# Allegro board OSCILLATOR.brd
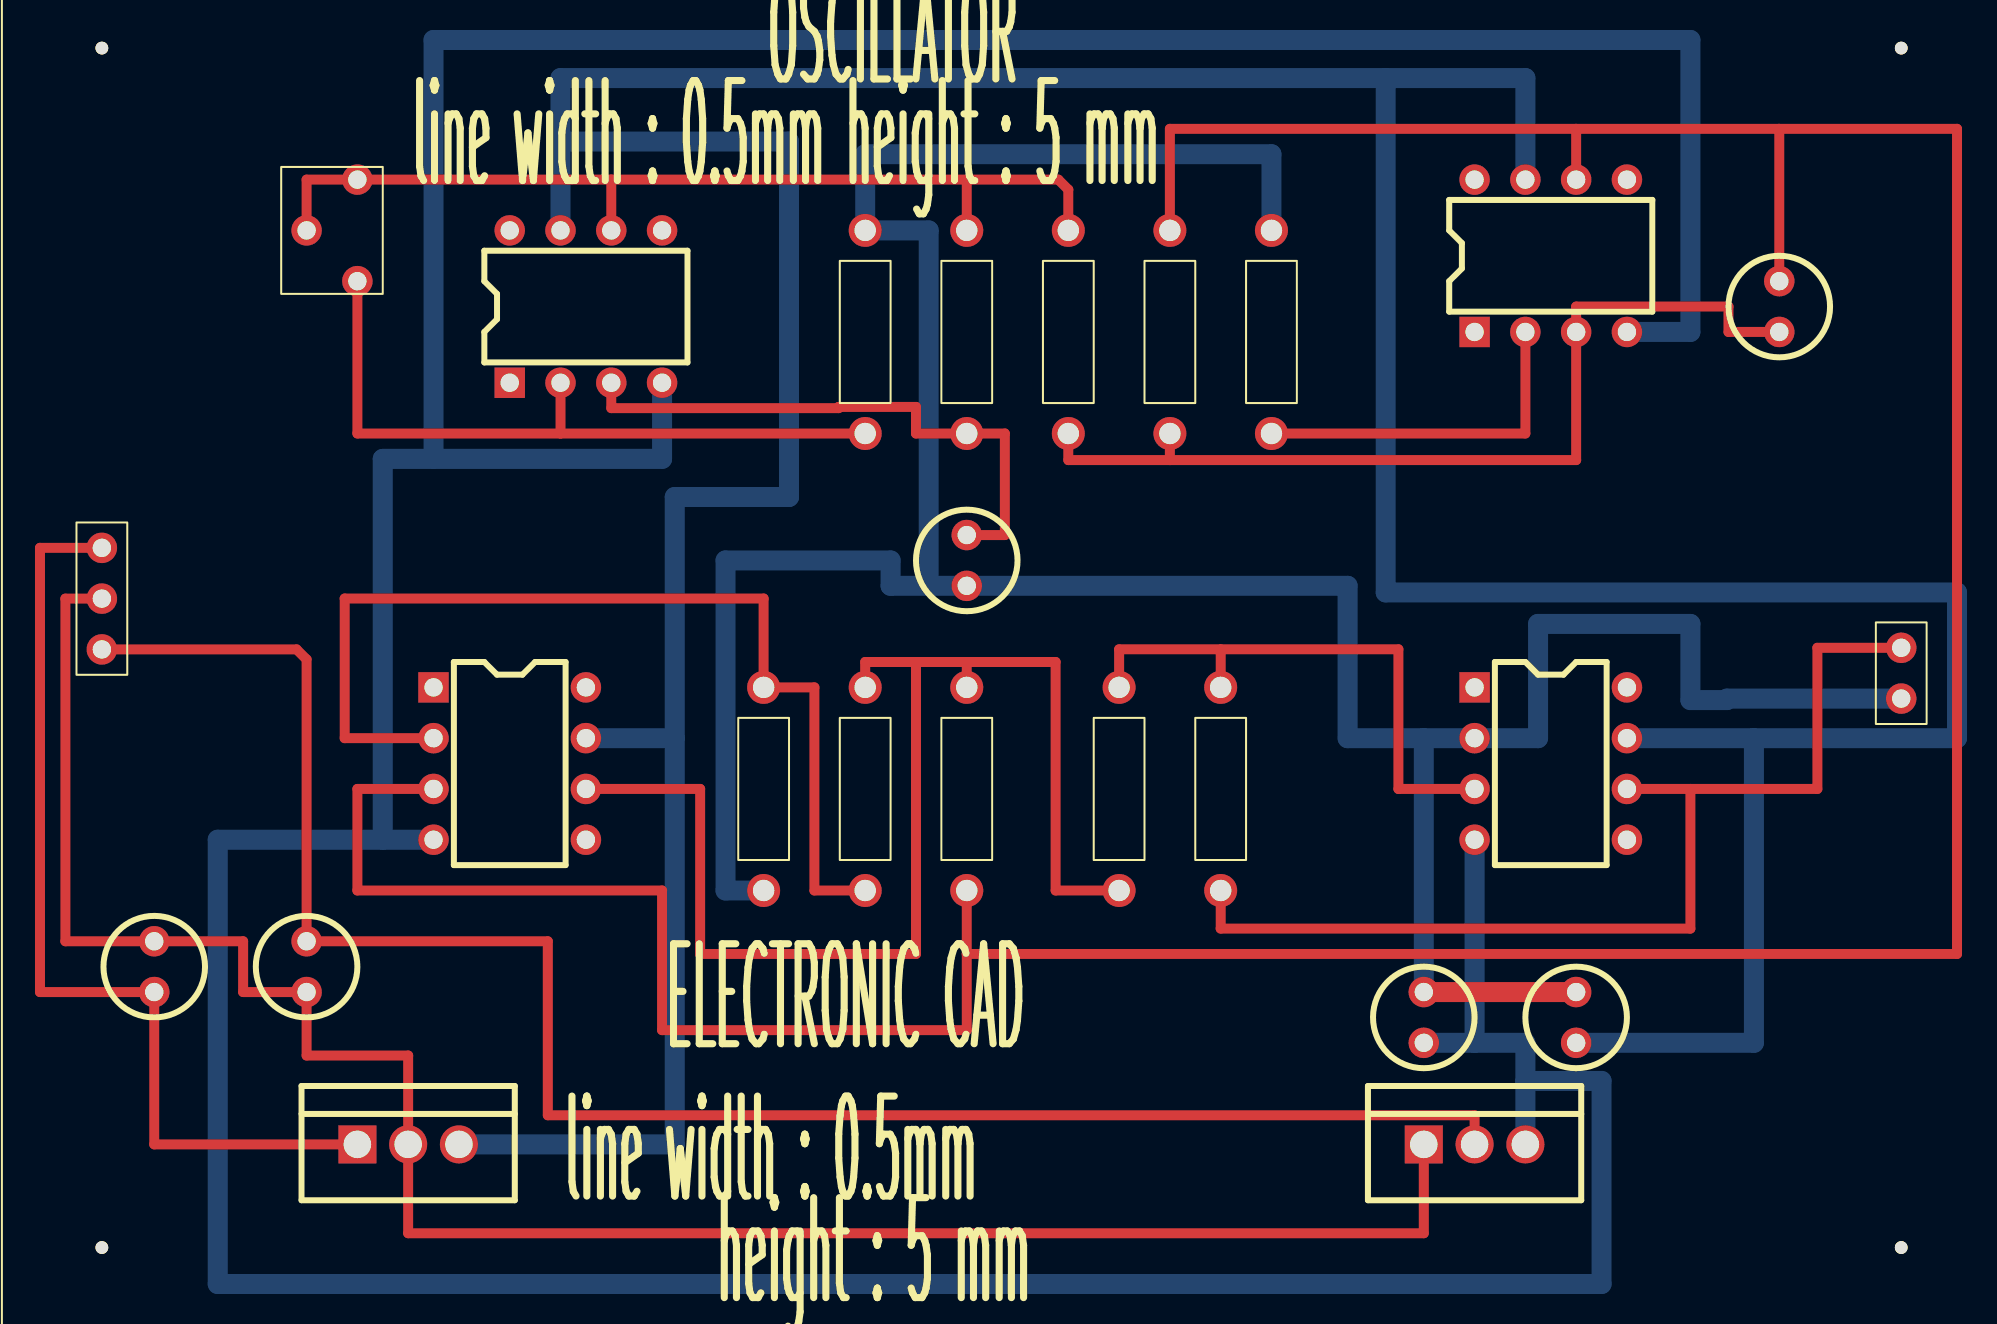
[diagram p0: board, top side]
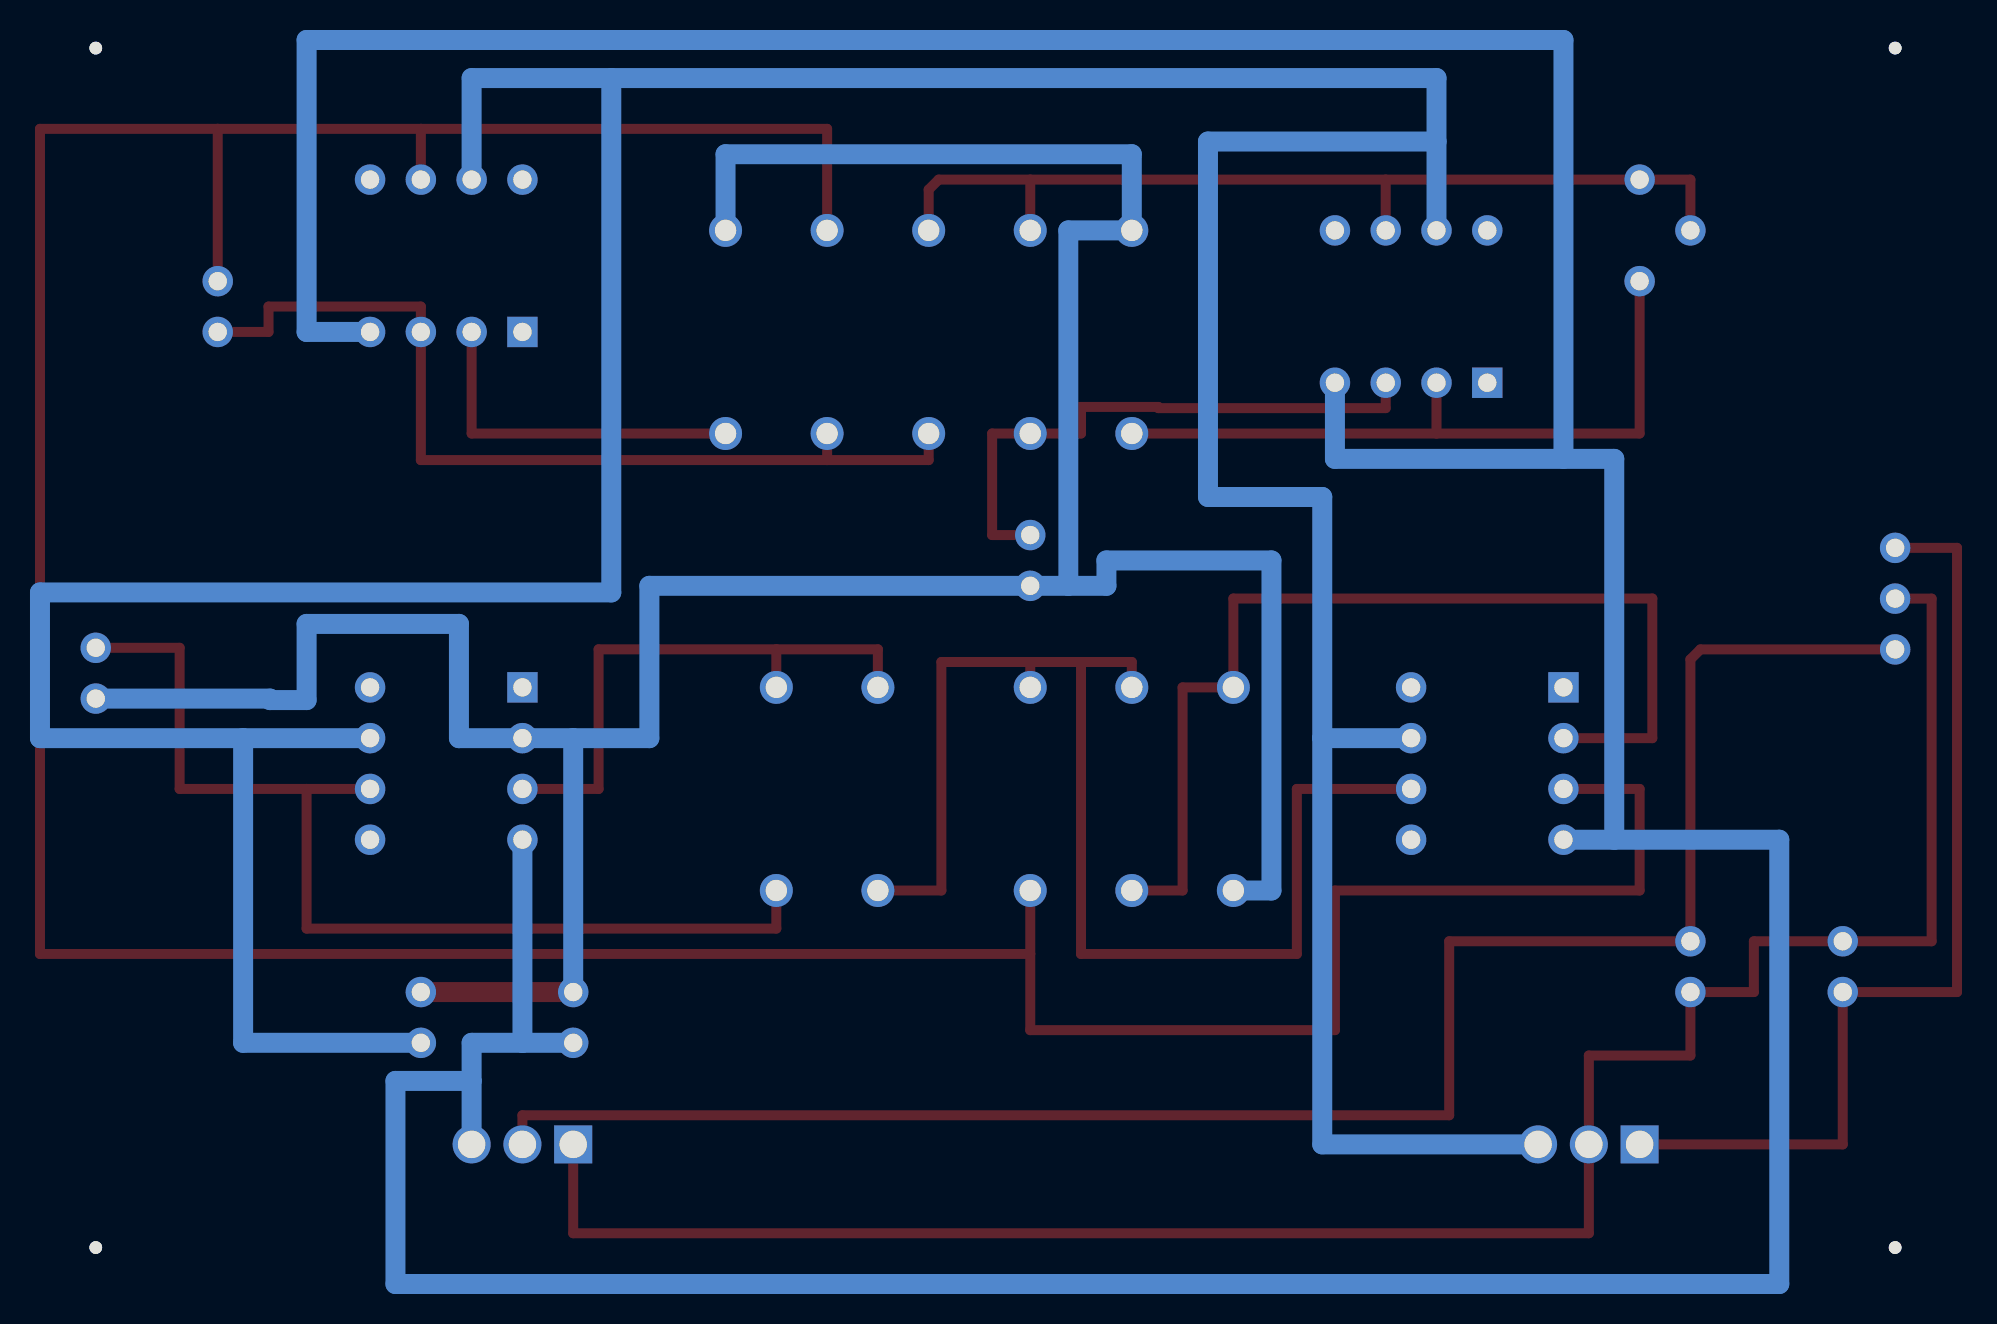
[diagram p1: board, bottom side, seen from below]

No outline. copper layers: TOP, BOTTOM. Coordinates in mm from the lowest, leftmost part position.

## Design rules (mm)
net group POWERRULL: nets +VCC -VCC GND
nets with their own width: min track width 0.5; nets N00985 N00992 N01159 N01294 N01355 N01990 N01994 N02045 N02142 N02163 N02311 OUT SIG

## Placement (name value [footprint] x y rotation side)
C1  270pF  [CAP196]  43.26 35.64 180 top
C2  0.001uF  [CAP196]  83.9 45.8 0 top
C3  0.1uF  [CAP196]  2.62 15.32 180 top
C4  0.1uF  [CAP196]  10.24 15.32 180 top
C5  0.1uF  [CAP196]  73.74 12.78 180 top
C6  0.1uF  [CAP196]  66.12 10.24 0 top
J1  CON2  [JUMPER2]  90 30 270 top
J2  CON3  [JUMPER3]  0 35 270 top
NOREF  -  [unnamed]  90 0 0 top
NOREF#2  -  [unnamed]  0 0 0 top
NOREF#3  -  [unnamed]  90 60 0 top
NOREF#4  -  [unnamed]  0 60 0 top
R1  10k  [RES400]  43.26 40.72 0 top
R2  10k  [RES400]  38.18 50.88 180 top
R3  62k  [RES400]  48.34 40.72 0 top
R4  10k  [RES400]  58.5 40.72 0 top
R5  10k  [RES400]  43.26 17.86 0 top
R6  10k  [RES400]  50.88 17.86 0 top
R7  10k  [RES400]  38.18 17.86 0 top
R8  10k  [RES400]  33.1 17.86 0 top
R9  10k  [RES400]  55.96 17.86 0 top
R10  1M  [RESADJ]  12.78 53.42 0 top
R11  100k  [RES400]  53.42 40.72 0 top
U1  LF351  [DIP8_3]  20.4 43.26 90 top
U2  LF351  [DIP8_3]  68.66 45.8 90 top
U3  LF351  [DIP8_3]  16.59 28.02 0 top
U4  LF351  [DIP8_3]  68.66 28.02 0 top
U5  LM7812/TO  [TO220AB]  12.78 5.16 0 top
U7  LM7912C/TO220  [TO220AB]  66.12 5.16 0 top

## Library data of the parts
C1-C6 = CAP: Tolerance: ***; User Part Number: ***
J1 = CON2: User Part Number: ***
J2 = CON3: User Part Number: ***
R1-R9 R11 = R: Tolerance: ***; User Part Number: ***
R10 = RESISTOR VAR: Tolerance: ***; User Part Number: ***
U1-U4 = LF351_2: Tolerance: ***; User Part Number: ***
U5 = LM7812/TO_2
U7 = LM7912C/TO220_2

## Footprints (pads in the part's own frame, mm; a bottom-side part is the same pattern mirrored in y, then rotated)
CAP196
  round 1.524 hole 0.914: 1(0,0) 2(0,2.54)
DIP8_3
  rect 1.524x1.524 hole 0.914: 1(0,0)
  round 1.524 hole 0.914: 2(0,-2.54) 3(0,-5.08) 4(0,-7.62) 5(7.62,-7.62) 6(7.62,-5.08) 7(7.62,-2.54) 8(7.62,0)
JUMPER2
  round 1.524 hole 0.914: 1(0,0) 2(2.54,0)
JUMPER3
  round 1.524 hole 0.914: 1(0,0) 2(2.54,0) 3(5.08,0)
RES400
  round 1.651 hole 1.067: 1(0,0) 2(0,10.16)
RESADJ
  round 1.524 hole 0.914: 1(0,0) 2(-2.54,-2.54) 3(0,-5.08)
TO220AB
  rect 1.905x1.905 hole 1.372: 1(0,0)
  round 1.905 hole 1.372: 2(2.54,0) 3(5.08,0)
unnamed
  round 0.635 hole 3.175 unplated: (0,0)

## Nets
+VCC: C5.2 U1.7 U2.7 U3.7 U4.7 U5.3(VOUT)
-VCC: C6.1 U1.4(V-) U2.4(V-) U3.4(V-) U4.4(V-) U7.3(OUT)
GND: C1.2 C5.1 C6.2 J1.2 R2.1 R4.2 R8.1 U4.2
OUT: J1.1 R9.1 U4.6
SIG: C2.2 R5.1 R11.2 U2.6 U3.3
N00985: C1.1 R1.1 U1.3
N00992: R1.2 R3.2 R10.1 R10.2(WIPER) U1.6
N01159: R2.2 R10.3 U1.2
N01294: C2.1 R3.1 R11.1 U2.3
N01355: R4.1 U2.2
N01990: R5.2 R6.1 R7.2 U3.6
N01994: R6.2 R9.2 U4.3
N02045: R7.1 R8.2 U3.2
N02142: C3.1 C4.2 J2.2 U5.2 U7.1
N02163: C3.2 J2.1 U5.1
N02311: C4.1 J2.3 U7.2

Pads without a net: U1 1 5 8; U2 1 5 8; U3 1 5 8; U4 1 5 8

## Routing (per net, layer and track width the routed paths; a pad name or vN(x,y) marks a point on that pad's centre or on a via; arc(x,y) is an arc through that point)
+VCC: length 245.7
  BOTTOM w1: U2.7 71.2,58.5 64.22,58.5 ; 82.63,25.48 U4.7 ; 82.63,25.48 82.63,10.24 C5.2 ; 82.63,25.48 92.79,25.48 92.79,32.77 64.22,32.77 64.22,58.5 ; 28.66,25.48 28.66,5.16 U5.3 ; 28.66,25.48 28.66,37.55 34.37,37.55 34.37,55.33 22.94,55.33 ; 28.66,25.48 U3.7 ; 22.94,55.33 22.94,58.5 64.22,58.5 ; 22.94,55.33 U1.7
-VCC: length 275
  BOTTOM w1: 16.59,39.45 28.02,39.45 U1.4 ; 16.59,39.45 16.59,60.41 79.45,60.41 79.45,45.8 U2.4 ; 16.59,39.45 14.05,39.45 14.05,20.4 ; 71.2,8.34 71.2,10.24 68.66,10.24 ; 71.2,8.34 U7.3 ; 71.2,8.34 75.01,8.34 75.01,-1.83 5.79,-1.83 5.79,20.4 14.05,20.4 ; 14.05,20.4 U3.4 ; 68.66,10.24 U4.4 ; 68.66,10.24 C6.1
GND: length 164.9
  TOP w1: C5.1 C6.2
  BOTTOM w1: 41.35,33.1 41.35,50.88 R2.1 38.18,54.69 58.5,54.69 R4.2 ; 41.35,33.1 39.45,33.1 39.45,34.37 31.2,34.37 31.2,17.86 R8.1 ; 41.35,33.1 C1.2 62.31,33.1 62.31,25.48 66.12,25.48 ; 66.12,25.48 U4.2 71.83,25.48 71.83,31.2 79.45,31.2 79.45,27.38 81.28,27.38 81.28,27.46 J1.2 ; 66.12,25.48 C6.2
OUT: length 53.2
  TOP w0.5: J1.1 85.81,30 85.81,22.94 79.45,22.94 ; 79.45,22.94 79.45,15.95 55.96,15.95 R9.1 ; 79.45,22.94 U4.6
SIG: length 198.8
  TOP w0.5: 43.26,14.68 43.26,10.88 28.02,10.88 28.02,17.86 12.78,17.86 12.78,22.94 U3.3 ; 43.26,14.68 R5.1 ; 43.26,14.68 92.79,14.68 92.79,55.96 83.9,55.96 ; U2.6 73.74,55.96 ; 73.74,55.96 53.42,55.96 R11.2 ; 73.74,55.96 83.9,55.96 ; 83.9,55.96 C2.2
N00985: length 29.3
  TOP w0.5: U1.3 25.48,41.99 36.85,41.99 36.85,42.05 40.72,42.05 40.72,40.72 R1.1 45.16,40.72 45.16,35.64 C1.1
N00992: length 48
  TOP w0.5: R10.2 10.24,53.42 R10.1 25.48,53.42 ; 25.48,53.42 43.26,53.42 ; 25.48,53.42 U1.6 ; 43.26,53.42 R1.2 ; 43.26,53.42 47.84,53.42 48.34,52.92 R3.2
N01159: length 35.6
  TOP w0.5: R10.3 12.78,40.72 22.94,40.72 ; 22.94,40.72 R2.2 ; 22.94,40.72 U1.2
N01294: length 47.2
  TOP w0.5: C2.1 81.36,45.8 81.36,47.07 73.74,47.07 U2.3 73.74,39.39 53.42,39.39 ; R3.1 48.34,39.39 53.42,39.39 ; R11.1 53.42,39.39
N01355: length 17.8
  TOP w0.5: U2.2 71.2,40.72 R4.1
N01990: length 66
  TOP w0.5: 40.72,29.29 38.18,29.29 R7.2 ; 40.72,29.29 43.26,29.29 ; 40.72,29.29 40.72,14.68 29.92,14.68 29.92,22.94 U3.6 ; 43.26,29.29 47.7,29.29 47.7,17.86 R6.1 ; 43.26,29.29 R5.2
N01994: length 28.6
  TOP w0.5: R6.2 50.88,29.92 55.96,29.92 ; R9.2 55.96,29.92 ; 55.96,29.92 64.85,29.92 64.85,22.94 U4.3
N02045: length 52.1
  TOP w0.5: U3.2 12.14,25.48 12.14,32.47 33.1,32.47 R8.2 35.64,28.02 35.64,17.86 R7.1
N02142: length 106
  TOP w0.5: U7.1 66.12,0.71 15.32,0.71 U5.2 15.32,9.61 10.24,9.61 C4.2 7.06,12.78 7.06,15.32 C3.1 -1.83,15.32 -1.83,32.46 J2.2
N02163: length 48.8
  TOP w0.5: J2.1 -3.09,35 -3.09,12.78 C3.2 2.62,5.16 U5.1
N02311: length 93.1
  TOP w0.5: U7.2 68.66,6.62 22.3,6.62 22.3,15.32 C4.1 10.24,29.42 9.74,29.92 J2.3

## Text on the board
Ref Des/Silkscreen Top: line width : 0.5mm height : 5 mm | line width : 0.5mm | ELECTRONIC CAD | height : 5 mm | OSCILLATOR
